# Altium PCB MAX_2870.PcbDoc (part 1 of 2)
Units mil, origin at the board's own origin, x right, y up, seen from the top; angles counter-clockwise.
Board outline 2360 x 1590 mil, 4 copper layers (Component Side, Ground Plane, Power Plane, Solder Side), stack 33.234 mil thick; 80 components, 61 nets, 332 pads, 500 vias.
Unrouted connection lines stored in the file: 26.
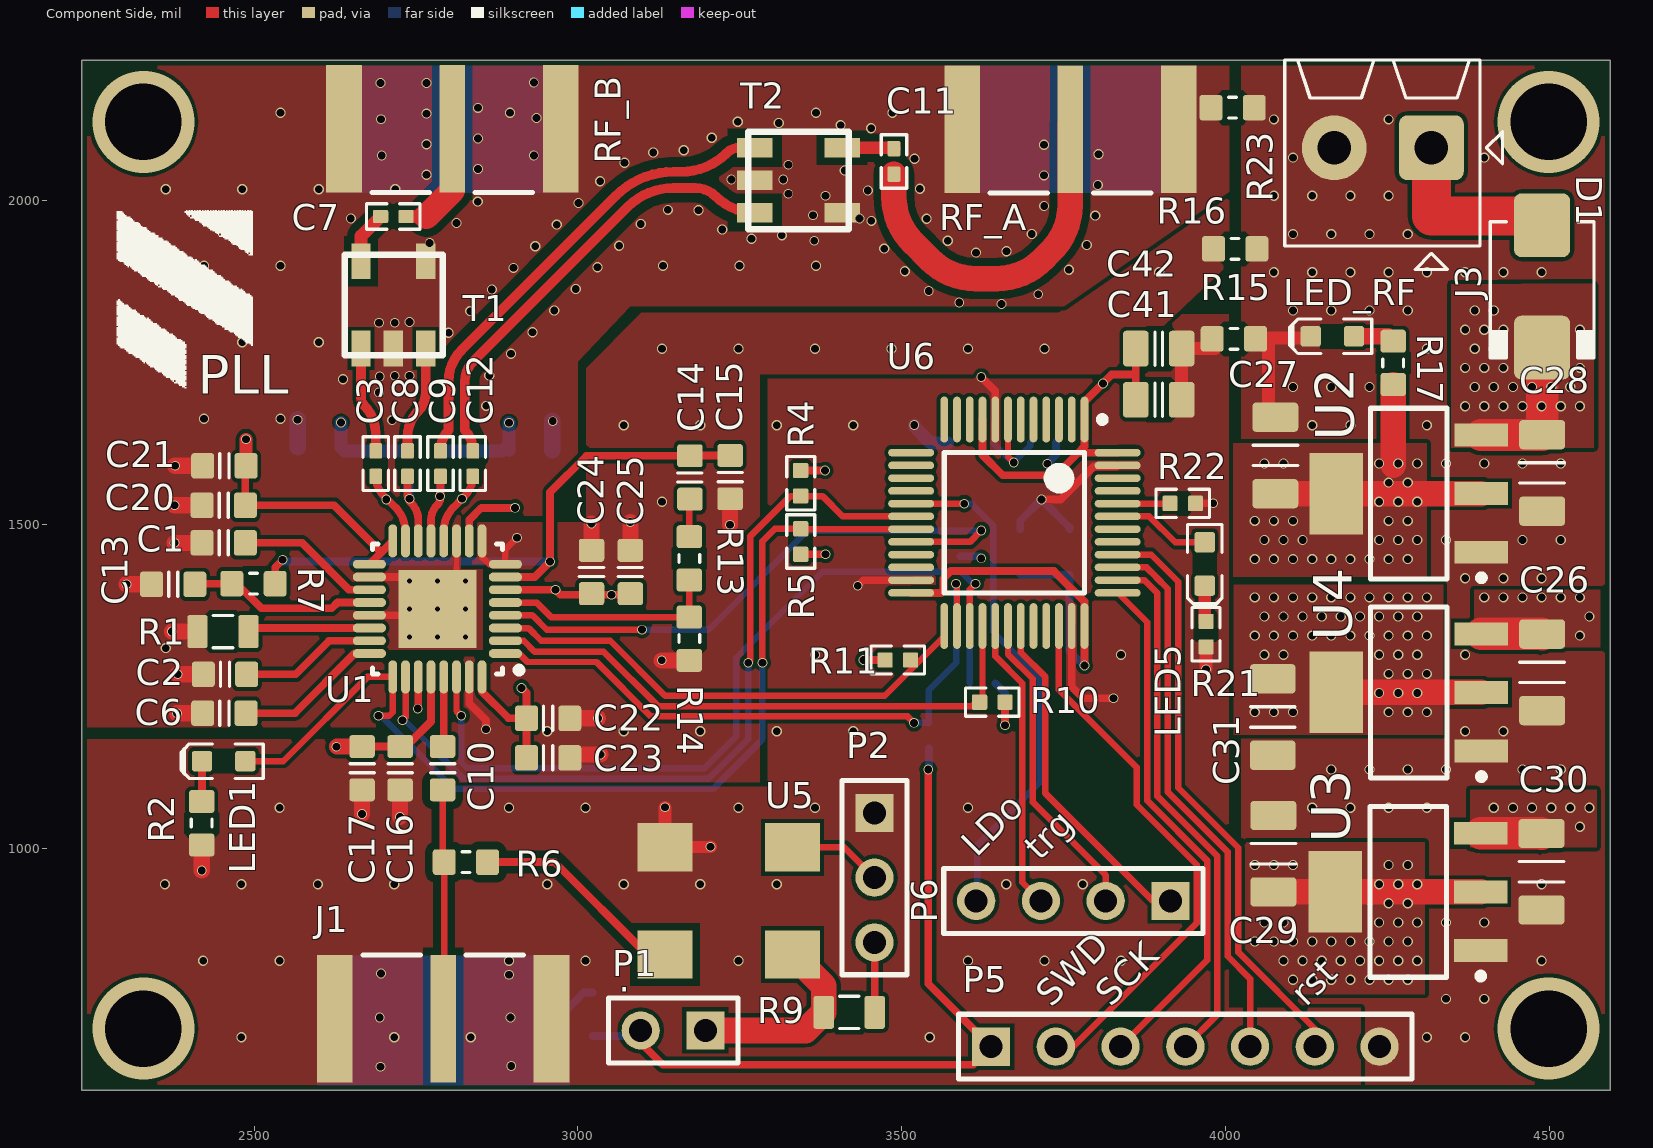
[diagram p0: Component Side view]
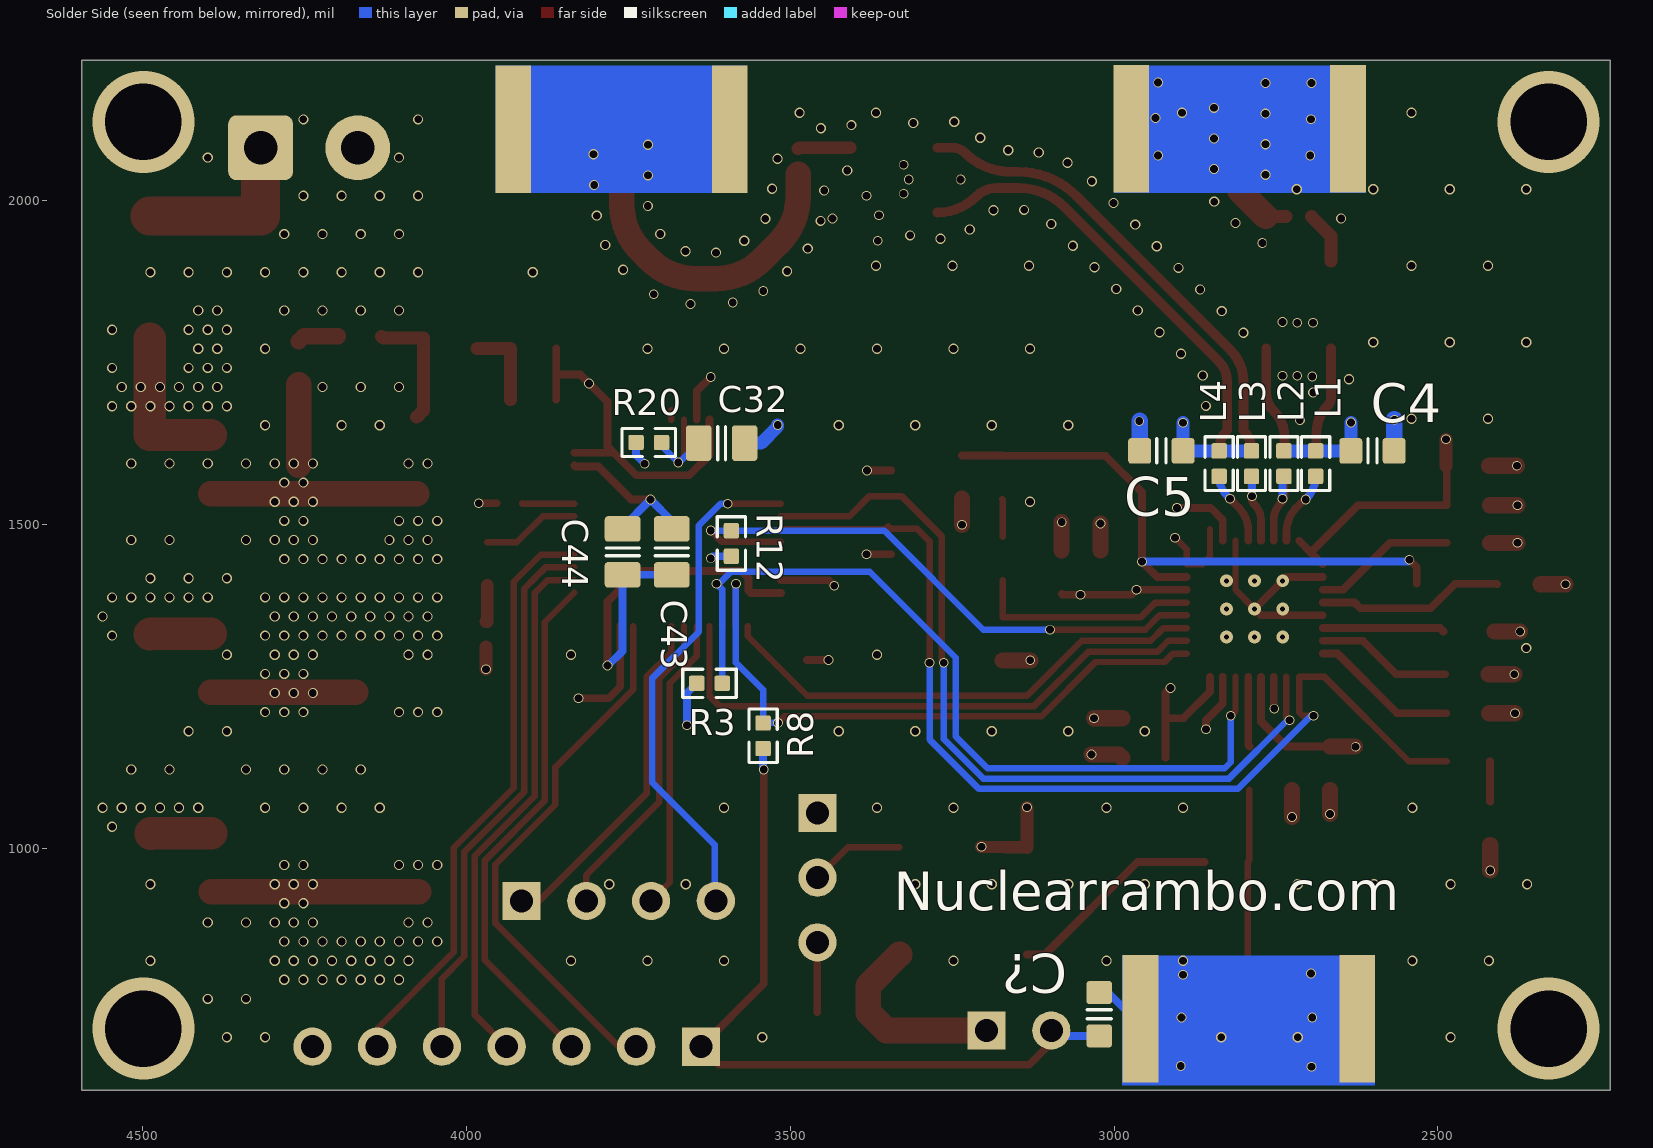
[diagram p1: Solder Side view, seen from below]
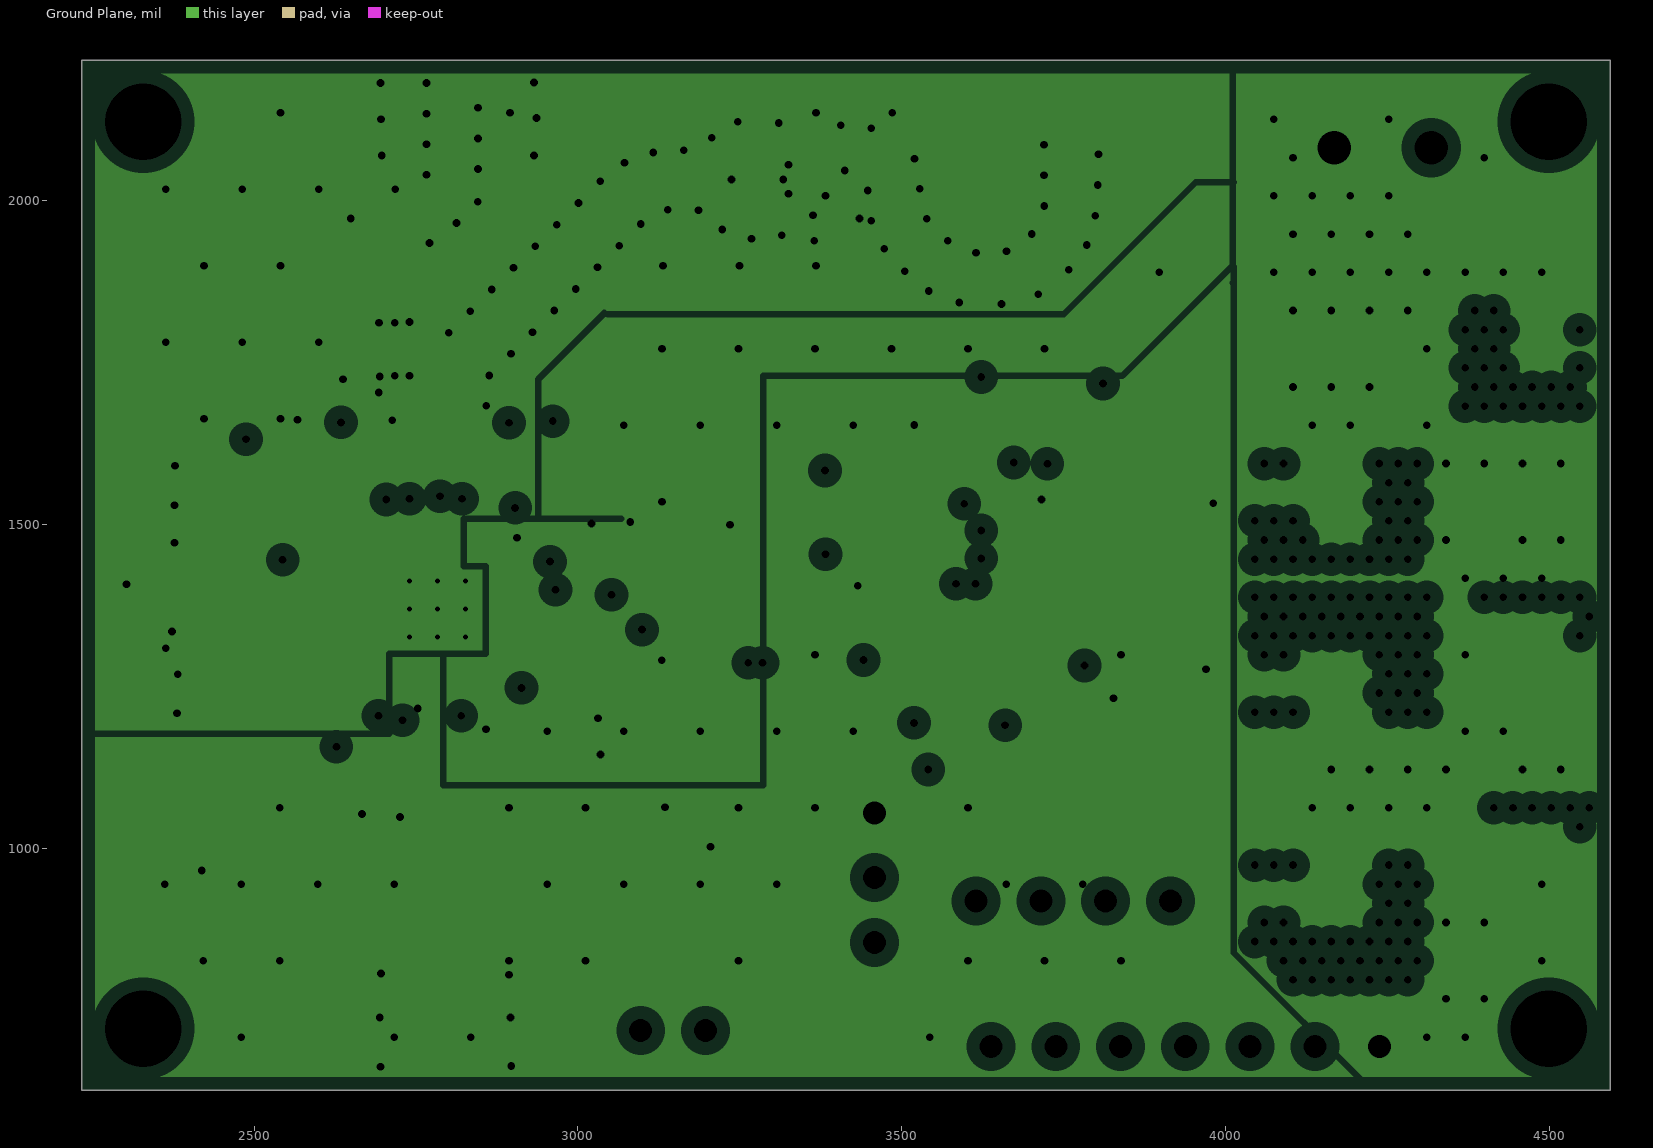
[diagram p2: Ground Plane, clearances drawn from the general rule]
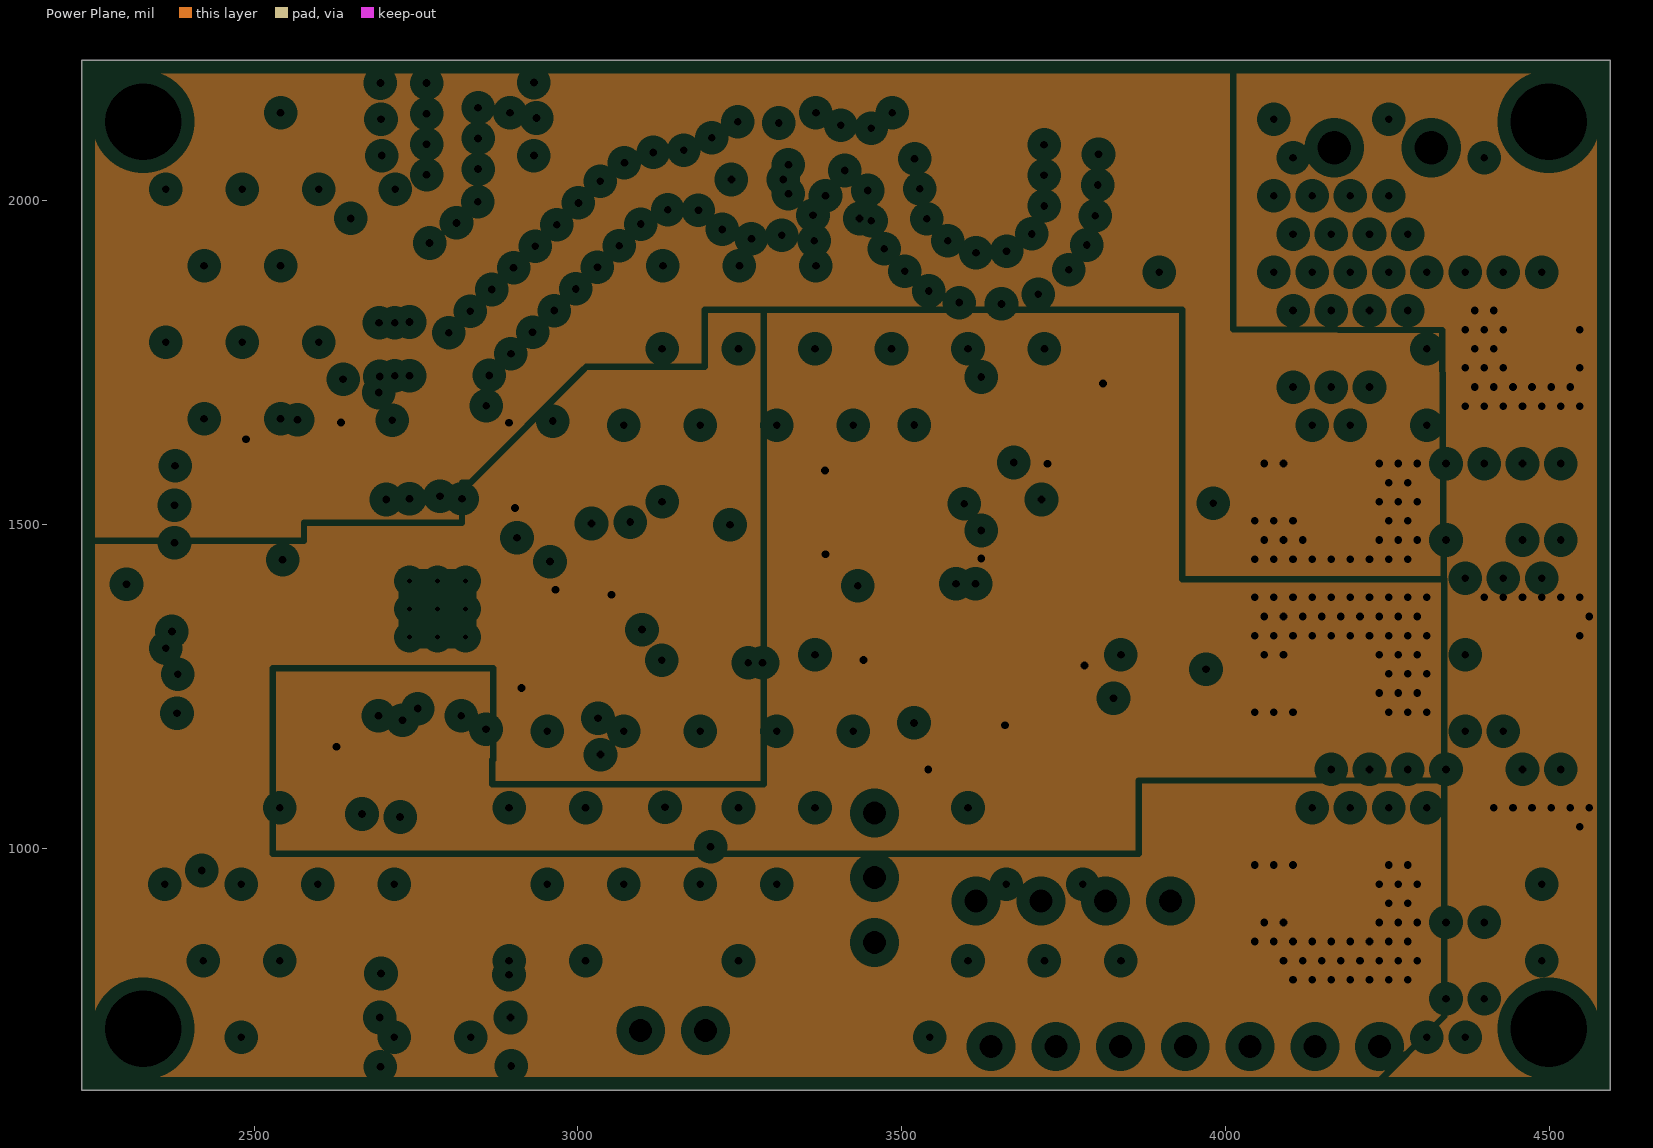
[diagram p3: Power Plane, clearances drawn from the general rule]

## Layer stack, top to bottom
Top Solder: solder mask 0.4, Solder Resist, Dk 3.5
Component Side: signal copper 1.4
Dielectric 1: core 12.6, FR-4, Dk 4.8
Ground Plane: plane copper 1.417, net (Multiple Nets)
Dielectric 3: prepreg 5, Dk 4.2
Power Plane: plane copper 1.417, net (Multiple Nets)
Dielectric 4: core 10, Dk 4.2
Solder Side: signal copper 1.4
Bottom Solder: solder mask 0.4, Solder Resist, Dk 3.5

## Board outline
2234,627 4594,627 4594,2217 2234,2217

## Design rules (kind name [scope] priority, off if disabled: settings)
BoardOutlineClearance [All] p1: gap=7.87 ignorepadtopadclearanceinfootprint=FALSE
Clearance ref [InNet('NetR6_1') or InNet('NetC10_1') vs InNet('GND_DIG')] p1: gap=12 ignorepadtopadclearanceinfootprint=TRUE
Clearance diffpair [InDifferentialPair('LO') vs InNet('GND_RF')] p2: gap=15 ignorepadtopadclearanceinfootprint=TRUE
Clearance rf [InNet('NetC11_2') or InNet('NetC11_1') or InNet('NetC7_1') or InNet('NetC7_2') vs InNet('GND_RF')] p3: gap=12 ignorepadtopadclearanceinfootprint=TRUE
Clearance Clearance_1 [InNet('NetC10_1') vs InNet('GND_RF')] p4: gap=15 ignorepadtopadclearanceinfootprint=TRUE
Clearance [All] p5: gap=6 ignorepadtopadclearanceinfootprint=TRUE
DiffPairsRouting [All] p1: maxlimit=10 minlimit=10 mostfreqgap=10 toplayer_minwidth=15 toplayer_maxwidth=15 toplayer_prefwidth=15 bottomlayer_minwidth=15 bottomlayer_maxwidth=15 bottomlayer_prefwidth=15 maxuncoupledlength=500
HoleToHoleClearance [All] p1: gap=6 allowstackedmicrovias=TRUE
PlaneClearance [All] p1: clearance=20
PlaneConnect [All] p1: planeconnectstyle=Direct reliefexpansion=20 reliefentries=4 reliefconductorwidth=10 reliefairgap=10
PolygonConnect [All] p1: connectstyle=Direct reliefconductorwidth=10 reliefentries=4 polygonreliefangle="90 Angle" airgapwidth=10
RoutingVias [All] p1: holewidth=8 width=12 viastyle="Through Hole" minholewidth=8 minwidth=12 maxholewidth=28 maxwidth=50
SolderMaskExpansion [All] p1: expansion=4
Width [All] p1: maxlimit=60 minlimit=10 preferedwidth=10
26 further rules are at their usual default settings.

## Classes and differential pairs
component class PLL_Controller_STM32: C32 C41 C42 C43 C44 LED5 P5 P6 R20 R21 R22 U6
component class Power_Supply: C26 C27 C28 C29 C30 C31 D1 J3 LED_RF R17 U2 U3 U4
component class MAX_2870: C1 C2 C3 C4 C5 C6 C7 C8 C9 C10 C11 C12 C13 C14 C15 C16 C17 C20 C21 C22 C23 C24 C25 C? J1 L1 L2 L3 L4 LED1 P1 P2 R1 R2 R3 R4 R5 R6 R7 R8 R9 R10 R11 R12 R13 R14 R15 R16 R23 RF_A RF_B T1 T2 U1 U5
differential pair RF: +RF_P -RF_N
differential pair LO: +LO_P -LO_N

## Components (designator, comment, footprint, x,y, rotation, side; value= is the part's Value field where it differs from the comment)
C1 "approved sub OK" CAPC1608X90N 2453,1472 r180 top value=1µ
C2 "approved sub OK" CAPC1608X90N 2455,1269 r0 top value=1µ
C3 "100p" CAPC1005X55N 2687.78,1594.33 r90 top
C4 "approved sub OK" CAPC1608X90N 2601,1614 r180 bottom value=10n
C5 "approved sub OK" CAPC1608X90N 2927,1614 r0 bottom value=10n
C6 "approved sub OK" CAPC1608X90N 2454,1209 r0 top value=1µ
C7 "100p" CAPC1005X55N 2715,1976 r0 top
C8 "100p" CAPC1005X55N 2736.78,1594.33 r90 top
C9 "100p" CAPC1005X55N 2787.78,1594.33 r90 top
C10 "approved sub OK" CAPC1608X90N 2791,1124 r90 top value=10n
C11 "100p" CAPC1005X55N 3488,2061 r270 top
C12 "100p" CAPC1005X55N 2837.78,1594.33 r90 top
C13 "100p" CAPC1608X90N 2375,1408 r180 top
C14 "approved sub OK" CAPC1608X90N 3173,1573 r270 top value=100n
C15 "100p" CAPC1608X90N 3235,1573.54 r90 top
C16 "100p" CAPC1608X90N 2725.41,1124 r270 top
C17 "approved sub OK" CAPC1608X90N 2666.68,1124 r270 top value=10n
C20 "100p" CAPC1608X90N 2453,1530 r180 top
C21 "approved sub OK" CAPC1608X90N 2454,1591 r180 top value=10n
C22 "100p" CAPC1608X90N 2954,1201 r0 top
C23 "approved sub OK" CAPC1608X90N 2954,1140 r0 top value=10n
C24 "100p" CAPC1608X90N 3021,1427 r90 top
C25 "approved sub OK" CAPC1608X90N 3081,1427 r90 top value=10n
C26 "approved sub OK" CAPC3216X180N 4489,1272 r270 top value=10µ
C27 "approved sub OK" CAPC3216X180N 4077,1607 r90 top value=10µ
C28 "approved sub OK" CAPC3216X180N 4489,1580 r270 top value=10µ
C29 "approved sub OK" CAPC3216X180N 4074,992 r90 top value=10µ
C30 "approved sub OK" CAPC3216X180N 4488,964 r270 top value=10µ
C31 "approved sub OK" CAPC3216X180N 4073,1203 r270 top value=10µ
C32 "approved sub OK" CAPC2012X135N 3606,1626 r0 bottom value=10µ
C41 "approved sub OK" CAPC2012X135N 3897,1693 r180 top value=10µ
C42 "approved sub OK" CAPC2012X135N 3897,1772 r180 top value=10µ
C43 "approved sub OK" CAPC2012X135N 3683,1458 r270 bottom value=10µ
C44 "approved sub OK" CAPC2012X135N 3759,1458 r270 bottom value=10µ
C? "approved sub OK" CAPC1608X90N 3023,744 r90 bottom value=10n
D1 "MBRS130L" DO-214AA 4489,1868 r270 top
J1 "32K145-400L5" ROS-32K145-400L5_V 2792,638.57 r180 top
J3 "Stackable ScrewTerm" 2P_PCB_ScrewTerm_90S_3.81MM 4318,2082 r90 top value="2 position"
L1 "Thick Film" RESC1005X40N 2688.78,1594.33 r270 bottom value=33n
L2 "Thick Film" RESC1005X40N 2737.78,1594.33 r270 bottom value=33n
L3 "Thick Film" RESC1005X40N 2787.78,1594.33 r270 bottom value=33n
L4 "Thick Film" RESC1005X40N 2837.78,1594.33 r270 bottom value=33n
LED1 "Green" LED-0603-GREEN 2453,1134.87 r180 top
LED5 "Green" LED-0603-GREEN 3968,1439.46 r270 top
LED_RF "Green" LED-0603-GREEN 4165,1791 r180 top
P1 "Header 2" HDR1X2 3197,719 r180 top
P2 "Header 3" HDR1X3 3458,1055 r270 top
P5 "Header 7" HDR1X7 3638,694 r0 top
P6 "Header 4" HDR1X4 3915,919 r180 top
R1 "Thick Film" RESC2012X70N 2452,1335 r180 top value=51K
R2 "Thick Film" RESC1608X55N 2419,1039 r90 top value=330E
R3 "Thick Film" RESC1005X40N 3624.79,1255 r0 bottom value=4K7
R4 "Thick Film" RESC1005X40N 3344,1564 r90 top value=4K7
R5 "Thick Film" RESC1005X40N 3344,1474 r270 top value=4K7
R6 "Thick Film" RESC1608X55N 2827,979 r180 top value=63K4
R7 "Thick Film" RESC1608X55N 2499,1409 r0 top value=63K4
R8 "Thick Film" RESC1005X40N 3542,1174 r90 bottom value=4K7
R9 "Thick Film" RESC2012X70N 3419,747 r0 top value=4K7
R10 "Thick Film" RESC1005X40N 3640,1226 r180 top value=4K7
R11 "Thick Film" RESC1005X40N 3494,1291 r0 top value=4K7
R12 "Thick Film" RESC1005X40N 3591,1471 r90 bottom value=4K7
R13 "Thick Film" RESC1608X55N 3172,1448 r270 top value=63K4
R14 "Thick Film" RESC1608X55N 3172,1324 r270 top value=63K4
R15 "Thick Film" RESC1608X55N 4013,1787 r0 top value=0E
R16 "Thick Film" RESC1608X55N 4015,1925.97 r0 top value=0E
R17 "Thick Film" RESC1608X55N 4259,1750 r90 top value=1K5
R20 "Thick Film" RESC1005X40N 3718.43,1627 r0 bottom value=1K
R21 "Thick Film" RESC1005X40N 3970,1331 r270 top value=1K
R22 "Thick Film" RESC1005X40N 3934,1533 r180 top value=1K
R23 "Thick Film" RESC1608X55N 4011,2144 r0 top value=0E
RF_A "32K145-400L5" ROS-32K145-400L5_V 3760.62,2209 r0 top
RF_B "32K145-400L5" ROS-32K145-400L5_V 2806,2210 r0 top
T1 "1:1 Balun" ETC-1-1-13R 2710,1837 r270 top
T2 "1:1 Balun" ETC-1-1-13R 3338,2037 r180 top
U1 "MAX2870" TQFN 2783,1370 r180 top
U2 "LM1117IMP-5.0" SOT223_L 4283,1548 r180 top
U3 "LM1117IMP-3.3" SOT223_L 4282,933 r180 top
U4 "LM1117IMP-3.3" SOT223_L 4283,1241 r180 top
U5 "Component_1" "5mm x 7mm TCXO" 3233,919 r0 top
U6 "STM32F101CBT6" LQFP48_N 3674,1503 r270 top

## Footprints (in the part's own frame and the unit in brackets; to place one, negate y for a bottom-side part, rotate by r counter-clockwise, add the part's x,y. Pads: shape width x height; smd on the part's side, far side on the other; paste and mask are expansions set on the pad)
2P_PCB_ScrewTerm_90S_3.81MM [mil] "TERM BLOCK 2POS SIDE ENT STACKABLE 3.81MM"
  rrect25% 100x100 hole 52: 1(0,0)
  round 100 hole 52: 2(0,150)
  silkscreen extent -188,-110 136,226, body extent -152,-75 136,225, height 335
"5mm x 7mm TCXO" [mm] "DFN, 4-Leads, Body 5.05x7.05mm, Pitch 5.00mm, IPC Medium Density"
  rect 2.15x1.9 smd: 1(-2.5,-2.1) 2(2.5,-2.1) 3(2.5,2.1) 4(-2.5,2.1)
  body extent -4,-3 4,3, height 1.3
CAPC1005X55N [mm] "Chip Capacitor, Body 1.0x0.5mm, EIA 0402, IPC Medium Density"
  round 0.2 on Mech15: 0(0,0)
  rrect20% 0.6x0.5 smd: 1(-0.5,0) 2(0.5,0)
  Component Side pour cut-out: -0.325,0.375 -0.2,0.5 0.2,0.5 0.325,0.375 0.325,-0.375 0.2,-0.5 -0.2,-0.5 -0.325,-0.375
  silkscreen extent -1.05,-0.5 1.05,0.5, body extent -0.52,-0.27 0.53,0.28, height 0.55
CAPC1608X90N [mm] "Chip Capacitor, Body 1.6x0.8mm, EIA 0603, IPC Medium Density"
  round 0.254 on Mech15: 0(0,0)
  rrect25% 0.9x1 smd: 1(-0.85,0) 2(0.85,0)
  silkscreen extent -0.18,-0.48 0.18,0.48, body extent -0.85,-0.45 0.85,0.45, height 0.89
CAPC2012X135N [mm] "Chip Capacitor, Body 2.0x1.2mm, EIA 0805, IPC Medium Density"
  round 0.254 on Mech15: 0(0,0)
  rrect25% 1x1.4 smd: 1(-0.9,0) 2(0.9,0)
  Component Side pour cut-out: -0.675,0.7 -0.475,0.9 0.475,0.9 0.675,0.7 0.675,-0.7 0.475,-0.9 -0.475,-0.9 -0.675,-0.7
  silkscreen extent -0.15,-0.65 0.15,0.65, body extent -1.1,-0.72 1.1,0.73, height 1.34
CAPC3216X180N [mm] "Chip Capacitor, Body 3.2x1.6mm, 1.8mm H, EIA 1206, IPC Medium Density"
  round 0.508 on Mech15: 0(0,0)
  rrect25% 1.15x1.8 smd: 1(-1.5,0) 2(1.5,0)
  silkscreen extent -0.4,-0.88 0.4,0.88, body extent -1.7,-0.9 1.7,0.9, height 1.8
DO-214AA [mm] "JEDEC DO214 variation AA. SMB"
  round 0.508 on Mech15: 0(0,0)
  rrect25% 2.5x2.2 smd: A(-2.4,0) K(2.4,0)
  silkscreen extent -2.54,-2.03 2.79,2.03, body extent -2.8,-1.97 2.8,1.98, height 2.62
ETC-1-1-13R [mil] "1:1 balun transformer"
  rect 55.12x29.92 smd: 1(-70,55) 2(-70,-45) 3(65,-45) 4(65,5) 5(65,55)
  silkscreen extent -80,-70 75,81, body extent -85,-75 80,86, height 108
HDR1X2 [mm] "Connector; Header; 2 Position"
  rect 1.5x1.5 hole 0.9: 1(0,0)
  round 1.5 hole 0.9: 2(2.54,0)
  silkscreen extent -1.27,-1.27 3.81,1.27
HDR1X3 [mm] "Connector; Header; 3 Position"
  rect 1.5x1.5 hole 0.9: 1(0,0)
  round 1.5 hole 0.9: 2(2.54,0) 3(5.08,0)
  silkscreen extent -1.27,-1.27 6.35,1.27
HDR1X4 [mm] "Connector; Header; 4 Position"
  rect 1.5x1.5 hole 0.9: 1(0,0)
  round 1.5 hole 0.9: 2(2.54,0) 3(5.08,0) 4(7.62,0)
  silkscreen extent -1.27,-1.27 8.89,1.27
HDR1X7 [mm] "Connector; Header; 7 Position"
  rect 1.5x1.5 hole 0.9: 1(0,0)
  round 1.5 hole 0.9: 2(2.54,0) 3(5.08,0) 4(7.62,0) 5(10.16,0) 6(12.7,0) 7(15.24,0)
  silkscreen extent -1.27,-1.27 16.51,1.27
LED-0603-GREEN [mm]
  round 0.254 on Mech15: 0(0,0)
  rrect25% 0.8x0.8 smd: A(-0.85,0) K(0.85,0)
  Component Side pour cut-out: -0.5,0.5 0.5,0.5 0.5,-0.5 -0.5,-0.5
  silkscreen extent -1.55,-0.67 1.68,0.67, body extent -0.8,-0.4 0.8,0.4, height 0.75
LQFP48_N [mm] "Thin QFP, 48-Leads, Body 7x7mm, Pitch 0.5mm, IPC Medium Density"
  oval 1.8x0.3 smd: 1(-4.05,2.75) 2(-4.05,2.25) 3(-4.05,1.75) 4(-4.05,1.25) 5(-4.05,0.75) 6(-4.05,0.25) 7(-4.05,-0.25) 8(-4.05,-0.75) 9(-4.05,-1.25) 10(-4.05,-1.75) 11(-4.05,-2.25) 12(-4.05,-2.75) 25(4.05,-2.75) 26(4.05,-2.25) 27(4.05,-1.75) 28(4.05,-1.25) 29(4.05,-0.75) 30(4.05,-0.25) 31(4.05,0.25) 32(4.05,0.75) 33(4.05,1.25) 34(4.05,1.75) 35(4.05,2.25) 36(4.05,2.75)
  oval 0.3x1.8 smd: 13(-2.75,-4.05) 14(-2.25,-4.05) 15(-1.75,-4.05) 16(-1.25,-4.05) 17(-0.75,-4.05) 18(-0.25,-4.05) 19(0.25,-4.05) 20(0.75,-4.05) 21(1.25,-4.05) 22(1.75,-4.05) 23(2.25,-4.05) 24(2.75,-4.05) 37(2.75,4.05) 38(2.25,4.05) 39(1.75,4.05) 40(1.25,4.05) 41(0.75,4.05) 42(0.25,4.05) 43(-0.25,4.05) 44(-0.75,4.05) 45(-1.25,4.05) 46(-1.75,4.05) 47(-2.25,4.05) 48(-2.75,4.05)
  silkscreen extent -4.17,-2.75 2.75,3.58, body extent -3.5,-3.5 3.5,3.5, height 1.6
RESC1005X40N [mm] "Chip Resistor, Body 1.0x0.5mm, EIA 0402, IPC Medium Density"
  round 0.2 on Mech15: 0(0,0)
  rrect20% 0.6x0.6 smd: 1(-0.5,0) 2(0.5,0)
  Component Side pour cut-out: -0.325,0.375 -0.2,0.5 0.2,0.5 0.325,0.375 0.325,-0.375 0.2,-0.5 -0.2,-0.5 -0.325,-0.375
  silkscreen extent -1.05,-0.55 1.05,0.55, body extent -0.52,-0.27 0.53,0.28, height 0.4
RESC1608X55N [mm] "Chip Resistor, Body 1.6x0.8mm, EIA 0603, IPC Medium Density"
  round 0.254 on Mech15: 0(0,0)
  rrect25% 0.9x1 smd: 1(-0.85,0) 2(0.85,0)
  Component Side pour cut-out: -0.6,0.5 -0.4,0.7 0.4,0.7 0.6,0.5 0.6,-0.5 0.4,-0.7 -0.4,-0.7 -0.6,-0.5
  silkscreen extent -0.15,-0.41 0.15,0.41, body extent -0.87,-0.47 0.88,0.48, height 0.54
RESC2012X70N [mm] "Chip Resistor, Body 2.0x1.2mm, EIA 0805, IPC Medium Density"
  round 0.254 on Mech15: 0(0,0)
  rrect25% 0.8x1.3 smd: 1(-1,0) 2(1,0)
  Component Side pour cut-out: -0.725,0.65 -0.525,0.85 0.525,0.85 0.725,0.65 0.725,-0.65 0.525,-0.85 -0.525,-0.85 -0.725,-0.65
  silkscreen extent -0.38,-0.64 0.38,0.64, body extent -1.1,-0.67 1.1,0.68, height 0.69
ROS-32K145-400L5_V [mm] "SMA Right Angle Jack, Edge Mount, 14.25x9.5x4.46mm, Rosenberger Recommended"
  rect 1x5 smd: 1(0,-2.5)
  rect 1.4x5 smd: MP(-4.25,-2.5) MP(4.25,-2.5)
  rect 1.4x5 smd far side paste-2: ""(-4.25,-2.5) ""(4.25,-2.5)
  silkscreen extent -3.15,-5 3.15,-5, body extent -4.75,-4.75 4.75,9.5, height 4.46
SOT223_L [mm] "SOT223, 4-Leads, Body 6.5x3.5mm, Pitch 2.3mm, Lead Span 7mm, IPC High Density"
  rect 2.1x0.9 smd: 1(-2.85,2.3) 2(-2.85,0) 3(-2.85,-2.3)
  rect 2.1x3.2 smd: 4(2.85,0)
  silkscreen extent -2.98,-3.35 1.5,3.42, body extent -1.85,-3.35 1.85,3.35, height 1.7
TQFN [mm] "PQFN, 32-Leads, Body 5.05x5.05mm, Pitch 0.50mm, Thermal Pad 3.05x3.05mm, IPC Medium Density"
  oval 1.3x0.35 smd: 1(-2.669,1.75) 2(-2.669,1.25) 3(-2.669,0.75) 4(-2.669,0.25) 5(-2.669,-0.25) 6(-2.669,-0.75) 7(-2.669,-1.25) 8(-2.669,-1.75) 17(2.669,-1.75) 18(2.669,-1.25) 19(2.669,-0.75) 20(2.669,-0.25) 21(2.669,0.25) 22(2.669,0.75) 23(2.669,1.25) 24(2.669,1.75)
  oval 0.35x1.3 smd: 9(-1.75,-2.669) 10(-1.25,-2.669) 11(-0.75,-2.669) 12(-0.25,-2.669) 13(0.25,-2.669) 14(0.75,-2.669) 15(1.25,-2.669) 16(1.75,-2.669) 25(1.75,2.669) 26(1.25,2.669) 27(0.75,2.669) 28(0.25,2.669) 29(-0.25,2.669) 30(-0.75,2.669) 31(-1.25,2.669) 32(-1.75,2.669)
  rect 3.05x3.05 smd: 33(0,0)
  silkscreen extent -3.32,-2.55 2.55,2.55, body extent -2.55,-2.55 2.55,2.55, height 0.75

## Part data
C1 C2 C6: library part CAPC_1u_0603_X7R_16V_10%, "Capacitor SMD Cer 1uF 10% 16V X7R 0603", Manufacturer 1="TDK Corporation", Manufacturer Part Number 1=C1608X7R1C105K, Package / Case="0603 (1608 metric)", Ratings="16V; X7R", Supplier Part Number 1=445-1604-1-ND, Tolerance=±10%, ComponentLink1Description=http://product.tdk.com/capacitor/mlcc/en/documents/mlcc_commercial_general_en.pdf, ComponentLink1URL=http://product.tdk.com/capacitor/mlcc/en/documents/mlcc_commercial_general_en.pdf, Material=ceramic, SCDType=spec, Supplier 1=Digi-Key
C3 C7 C8 C9 C11 C12: library part CAPC_100p_0402_NP0_50V_5%, "Capacitor SMD Cer 100pF 5% 50V NP0 0402", Manufacturer 1=Yageo, Manufacturer 2="Samsung Electro-Mechanics America, Inc", Manufacturer 3="TDK Corporation", Manufacturer 4=Kemet, Manufacturer Part Number 1=CC0402JRNPO9BN101, Manufacturer Part Number 2=CL05C101JB5NNNC, Manufacturer Part Number 3=C1005C0G1H101J050BA, Manufacturer Part Number 4=C0402C101J5GACTU, Operating Temperature="-55°C ~ 125°C", Package / Case="0402 (1005 Metric)", Ratings="50V; NP0", Supplier Part Number 1=311-1024-1-ND, Tolerance=±5%, ComponentLink1Description=http://www.yageo.com/documents/recent/UPY-GP_NP0_16V-to-50V_9.pdf, ComponentLink1URL=http://www.yageo.com/documents/recent/UPY-GP_NP0_16V-to-50V_9.pdf, ComponentLink2Description=http://www.samsungsem.com/servlet/FileDownload?type=spec&file=CL05C101JB5NNNC.pdf, ComponentLink2URL=http://www.samsungsem.com/servlet/FileDownload?type=spec&file=CL05C101JB5NNNC.pdf, ComponentLink3Description=http://product.tdk.com/capacitor/mlcc/en/documents/mlcc_commercial_general_en.pdf, ComponentLink3URL=http://product.tdk.com/capacitor/mlcc/en/documents/mlcc_commercial_general_en.pdf, ComponentLink4Description=http://www.kemet.com/datasheets&C0402C101J5GACTU, ComponentLink4URL=http://www.kemet.com/datasheets&C0402C101J5GACTU, RoHS 1="RoHS Compliant", RoHS 2="RoHS Compliant", RoHS 3="RoHS Compliant", RoHS 4="RoHS Compliant", SCDType=spec, Size / Dimension="0.039\" L x 0.020\" W (1.00mm x 0.50mm)", Supplier 1=Digi-Key, Supplier 2=Digi-Key, Supplier 3=Digi-Key, Supplier 4=Digi-Key, Supplier Part Number 2=1276-1025-1-ND, Supplier Part Number 3=445-1247-1-ND, Supplier Part Number 4=399-3194-1-ND
C4 C5 C10 C17 C21 C23 C25 C?: library part CAPC_10n_0603_X7R_100V_10%, "Capacitor SMD Cer 10nF 10% 100V X7R 0603", Manufacturer="Murata Electronics North America", Manufacturer Part Number=GCM188R72A103KA37D, Package / Case="0603 (1608 metric)", Ratings="100V; X7R", Supplier Part Number 1=490-4781-1-ND, Tolerance=±10%, Material=ceramic, SCDType=undef, Supplier 1=Digi-Key
C13 C15 C16 C20 C22 C24: library part CAPC_100p_0603_NP0_50V_1%, "Capacitor SMD Cer 100pF 1% 50V NP0 0603", Manufacturer 1="AVX Corporation", Manufacturer 2="Samsung Electro-Mechanics America, Inc", Manufacturer 3=Kemet, Manufacturer Part Number 1=06035A101FAT2A, Manufacturer Part Number 2=CL10C101FB8NNNC, Manufacturer Part Number 3=C0603C101F5GACTU, Operating Temperature="-55°C ~ 125°C", Package / Case="0603 (1608 Metric)", Ratings="50V; NP0", Supplier Part Number 1=478-6202-1-ND, Tolerance=±1%, ComponentLink1Description=http://www.avx.com/docs/Catalogs/ccog.pdf, ComponentLink1URL=http://www.avx.com/docs/Catalogs/ccog.pdf, ComponentLink2Description=http://www.samsungsem.com/servlet/FileDownload?type=spec&file=CL10C101FB8NNNC.pdf, ComponentLink2URL=http://www.samsungsem.com/servlet/FileDownload?type=spec&file=CL10C101FB8NNNC.pdf, ComponentLink3Description=http://www.kemet.com/datasheets&C0603C101F5GACTU, ComponentLink3URL=http://www.kemet.com/datasheets&C0603C101F5GACTU, RoHS 1="RoHS Compliant", RoHS 2="RoHS Compliant", RoHS 3="RoHS Compliant", SCDType=source, Size / Dimension="0.063\" L x 0.032\" W (1.60mm x 0.81mm)", Supplier 1=Digi-Key, Supplier 2=Digi-Key, Supplier 3=Digi-Key, Supplier Part Number 2=1276-2159-1-ND, Supplier Part Number 3=399-7819-1-ND, Thickness (Max)="0.035\" (0.90mm)"
C14: library part CAPC_100n_0603_X7R_50V_10%, "Capacitor SMD Cer 100nF 10% 50V X7R 0603", Manufacturer 1="AVX Corporation", Manufacturer 2="TDK Corporation", Manufacturer Part Number 1=06035C104KAT2A, Manufacturer Part Number 2=C1608X7R1H104K, Package / Case="0603 (1608 Metric)", Ratings="50V; X7R", Supplier Part Number 1=478-5052-1-ND, Tolerance=±10%, ComponentLink1Description=http://www.avx.com/docs/Catalogs/cx7r.pdf, ComponentLink1URL=http://www.avx.com/docs/Catalogs/cx7r.pdf, ComponentLink2Description=http://product.tdk.com/capacitor/mlcc/en/documents/mlcc_commercial_general_en.pdf, ComponentLink2URL=http://product.tdk.com/capacitor/mlcc/en/documents/mlcc_commercial_general_en.pdf, Material=ceramic, SCDType=spec, Supplier 1=Digi-Key, Supplier 2=Digi-Key, Supplier Part Number 2=445-1314-1-ND
C26 C27 C28 C29 C30 C31: library part CAPC_10u_1206_16V, "Capacitor SMD Cer 10uF 10% 16V X7R 1206", Manufacturer 1=Kemet, Manufacturer Part Number 1=C1206C106K4RACTU, Package / Case="1206 (3216 metric)", Ratings="16V; X7R", Supplier Part Number 1=399-3525-1-ND, Tolerance=±10%, Material=ceramic, SCDType=spec, Supplier 1=Digi-Key
C32 C41 C42 C43 C44: library part CAPC_10u_0805_10V, "Capacitor SMD Cer 10uF 10% 10V X5R 0805", Manufacturer 1="AVX Corporation", Manufacturer 2=Kemet, Manufacturer Part Number 1=0805ZD106KAT2A, Manufacturer Part Number 2=C0805C106K8PACTU, Package / Case="0805 (2012 metric)", Ratings="10V; X5R", Supplier Part Number 1=478-5167-1-ND, Tolerance=±10%, ComponentLink1Description=http://www.avx.com/docs/Catalogs/cx5r.pdf, ComponentLink1URL=http://www.avx.com/docs/Catalogs/cx5r.pdf, ComponentLink2Description=http://www.kemet.com/datasheets&C0805C106K8PACTU, ComponentLink2URL=http://www.kemet.com/datasheets&C0805C106K8PACTU, Material=ceramic, SCDType=spec, Supplier 1=Digi-Key, Supplier 2=Digi-Key, Supplier Part Number 2=399-4925-1-ND
D1: library part DIODE_SCHOTTKY_MBRS130L, "Diode Schottky SMD 30V 2A DO-214AA", Manufacturer 1="Fairchild Semiconductor", Package / Case="DO-214AA, SMB", Ratings="30Vr; 2A", Supplier Part Number 1=MBRS130LFSCT-ND, Manufacturer Part Number 1=MBRS130L, Material=Si, SCDType=source, Supplier 1=Digi-Key
J1 RF_A RF_B: "SMA Right Angle Jack, Edge Mount, Up to 18 GHz, -55 to 155 degC", ComponentLink1Description="Manufacturer URL", ComponentLink1URL=http://www.rosenberger.de, ComponentLink2Description=Datasheet, ComponentLink2URL=http://rosenberger.de/ok/images/documents/db/32K145-400L5.pdf, ComponentLink3Description="Package Specification", ComponentLink3URL=http://rosenberger.de/ok/images/documents/db/32K145-400L5.pdf, ComponentLink4Description="Series Overview / Design Note", ComponentLink4URL=http://rosenberger.de/ok/images/documents/spez/32.pdf, ComponentLink5Description="Webshop / RFQ", ComponentLink5URL=http://www.rosenberger.com/en/contact/sales/, DatasheetVersion=b00, Desgin Note 2="For more information about DRC setting, please look at following webpage, http://techdocs.altium.com/display/SCRT/Design+Rule+for+Edge-Mount+Connectors", Design Note 1="Footprint in library is a generic example - only application specific footprint delivers High Performance", Mounting Technology="Surface Mount", PackageDescription="SMA Right Angle Jack, Edge Mount, 14.25 x 9.5 x 4.46 mm", PackageReference=32K145-400L5, PackageVersion=b00, PartNumber=32K145-400L5
J3: library part 2P_ScrewTerm_90S_3.81MM, "Terminal Block Screw Type THT 2-Position 3.81mm pitch", Color=Black, Manufacturer 1="Tyco Electronics", Manufacturer Part Number 1=1776113-2, Package / Case="Side Entry; 3.81mm pitch", Supplier Part Number 1=A97976-ND, Category="Connectors Interconnects", Pitch="0.150\" (3.81mm)", Positions Per Level=2, SCDType=undef, Supplier 1=Digi-Key
L1 L2 L3 L4: library part RES_100K_0402_5%, "Resistor SMD chip 100k Ohm 0.063W 5% 0402", Manufacturer 1="Vishay Dale", Manufacturer 2=Yageo, Manufacturer Part Number 1=CRCW0402100KJNED, Manufacturer Part Number 2=RC0402JR-07100KL, Package / Case="0402 (1005 Metric)", Ratings="1/16 W", Supplier Part Number 1=541-100KJCT-ND, Tolerance=±5%, ComponentLink1Description=http://www.vishay.com/doc?20035, ComponentLink1URL=http://www.vishay.com/doc?20035, ComponentLink2Description=http://www.yageo.com/documents/recent/PYu-RC0402_51_RoHS_L_6.pdf, ComponentLink2URL=http://www.yageo.com/documents/recent/PYu-RC0402_51_RoHS_L_6.pdf, SCDType=undef, Supplier 1=Digi-Key, Supplier 2=Digi-Key, Supplier Part Number 2=311-100KJRCT-ND
LED1 LED5 LED_RF: library part LED_SMD_Green_0603_570nm, "LED 0603 SMD Green 570nm 50mcd 20mA", Current - Test=20mA, Manufacturer 1="Kingbright Company LLC", Manufacturer Part Number 1=APT1608CGCK, Package / Case="0603 (1608 metric)", Ratings="20mcd min; 50 mcd typ; 570 nm", Supplier Part Number 1=754-1116-1-ND, Voltage - Forward (Vf) @ 10mA=2.0V, Voltage - Forward (Vf) Typ=2.1V, Color=Green, ComponentLink1Description=http://www.us.kingbright.com/images/catalog/SPEC/APT1608CGCK.pdf, ComponentLink1URL=http://www.us.kingbright.com/images/catalog/SPEC/APT1608CGCK.pdf, Lens Style/Size="Rectangle with Flat Top, 1.1mm x 0.8mm", Lens Type=Clear, Material=AlGaInP, RoHS 1="RoHS Compliant", SCDType=source, Supplier 1=Digi-Key, Viewing Angle=120°, Wavelength - Dominant=570nm, Wavelength - Peak=574nm
P1: "Header, 2-Pin", LatestRevisionDate=17-Jul-2002, LatestRevisionNote="Re-released for DXP Platform.", Publisher="Altium Limited"
P2: "Header, 3-Pin", LatestRevisionDate=17-Jul-2002, LatestRevisionNote="Re-released for DXP Platform.", Publisher="Altium Limited"
P5: "Header, 7-Pin", LatestRevisionDate=17-Jul-2002, LatestRevisionNote="Re-released for DXP Platform.", Publisher="Altium Limited"
P6: "Header, 4-Pin", LatestRevisionDate=17-Jul-2002, LatestRevisionNote="Re-released for DXP Platform.", Publisher="Altium Limited"
R1: library part RES_51K_0805_1%, "Resistor SMD chip 51k Ohm 0.125W 1% 0805", Manufacturer 1=Yageo, Manufacturer Part Number 1=RC0805FR-0751KL, Package / Case="0805 (2012 Metric)", Ratings=1/8W, Supplier Part Number 1=311-51.0KCRCT-ND, Tolerance=±1%, SCDType=spec, Supplier 1=Digi-Key
R2: library part RES_3K3_0603_5%, "Resistor SMD chip 3.3k Ohm 0.1W 5% 0603", Manufacturer 1=Yageo, Manufacturer Part Number 1=RC0603JR-073K3L, Package / Case="0603 (1608 metric)", Ratings="1/10 W", Supplier Part Number 1=311-3.3KGRTR-ND, Tolerance=±5%, Material="thick film", SCDType=undef, Supplier 1=Digi-Key
R3 R4 R5 R8 R10 R11 R12: library part RES_1M_0402_5%, "Resistor SMD chip 1M Ohm 0.063W 5% 0402", Manufacturer 1="Vishay Dale", Manufacturer 2=Yageo, Manufacturer Part Number 1=CRCW04021M00JNED, Manufacturer Part Number 2=RC0402JR-071ML, Package / Case="0402 (1005 Metric)", Power Rating="0.063W, 1/16W", Ratings="1/16 W", Supplier Part Number 1=541-1.0MJCT-ND, Tolerance=±5%, ComponentLink1Description=http://www.vishay.com/doc?20035, ComponentLink1URL=http://www.vishay.com/doc?20035, ComponentLink2Description=http://www.yageo.com/documents/recent/PYu-RC0402_51_RoHS_L_6.pdf, ComponentLink2URL=http://www.yageo.com/documents/recent/PYu-RC0402_51_RoHS_L_6.pdf, Material="Thick Film", SCDType=spec, Supplier 1=Digi-Key, Supplier 2=Digi-Key, Supplier Part Number 2=311-1.0MJRCT-ND
R6 R7 R13 R14: library part RES_63K4_0603_1%, "Resistor SMD chip 63.4K Ohm 0.1W 1% 0603", Manufacturer 1=Yageo, Manufacturer Part Number 1=RC0603FR-0763K4L, Package / Case="0603 (1608 Metric)", Ratings=1/10W, Supplier Part Number 1=311-63.4KHRCT-ND, Tolerance=±1%, ComponentLink1Description=http://www.yageo.com/documents/recent/PYu-RC0603_51_RoHS_L_4.pdf, ComponentLink1URL=http://www.yageo.com/documents/recent/PYu-RC0603_51_RoHS_L_4.pdf, SCDType=spec, Supplier 1=Digi-Key
R9: library part RES_4K7_0805_1%, "Resistor SMD chip 4.7k Ohm 0.125W 1% 0805", Manufacturer 1=Vishay/Dale, Manufacturer Part Number 1=CRCW08054K70FKEA, Package / Case="0805 (2012 metric)", Ratings=1/8W, Supplier Part Number 1=541-4.70KCCT-ND, Tolerance=±1%, SCDType=spec, Supplier 1=Digi-Key
R15 R16 R23: library part RES_1K_0603_1%, "Resistor SMD chip 1k Ohm 0.1W 1% 0603", Manufacturer 1=Yageo, Manufacturer Part Number 1=RC0603FR-071KL, Package / Case="0603 (1608 Metric)", Ratings=1/10W, Supplier Part Number 1=311-1.00KHRCT-ND, SCDType=spec, Supplier 1=Digi-Key
R17: library part RES_1K5_0603_5%, "Resistor SMD chip 1.5k Ohm 0.1W 5% 0603", Manufacturer 1=Yageo, Manufacturer Part Number 1=RC0603JR-071K5L, Package / Case="0603 (1608 metric)", Ratings="1/10 W", Supplier Part Number 1=311-1.5KGRCT-ND, Tolerance=±5%, Material="thick film", SCDType=spec, Supplier 1=Digi-Key
R20 R21 R22: library part RES_1K_0402_5%, "Resistor SMD chip 1k Ohm 0.063W 5% 0402", Manufacturer 1=Yageo, Manufacturer 2="Vishay Dale", Manufacturer 3="Samsung Electro-Mechanics America, Inc", Manufacturer 4="Rohm Semiconductor", Manufacturer 5="Panasonic Electronic Components", Manufacturer Part Number 1=RC0402JR-071KL, Manufacturer Part Number 2=CRCW04021K00JNED, Manufacturer Part Number 3=RC1005J102CS, Manufacturer Part Number 4=MCR01MRTJ102, Manufacturer Part Number 5=ERJ-2GEJ102X, Package / Case="0402 (1005 Metric)", Ratings="1/16 W", Supplier Part Number 1=311-1.0KJRCT-ND, Tolerance=±5%, ComponentLink1Description=http://www.yageo.com/documents/recent/PYu-RC0402_51_RoHS_L_6.pdf, ComponentLink1URL=http://www.yageo.com/documents/recent/PYu-RC0402_51_RoHS_L_6.pdf, ComponentLink2Description=http://www.vishay.com/doc?20035, ComponentLink2URL=http://www.vishay.com/doc?20035, ComponentLink3Description=http://www.samsungsem.com/servlet/FileDownload?filename=productcatalog/pdf/Chip_Resistor.pdf, ComponentLink3URL=http://www.samsungsem.com/servlet/FileDownload?filename=productcatalog/pdf/Chip_Resistor.pdf, ComponentLink4Description=http://rohmfs.rohm.com/en/products/databook/datasheet/passive/resistor/chip_resistor/mcr_g.pdf, ComponentLink4URL=http://rohmfs.rohm.com/en/products/databook/datasheet/passive/resistor/chip_resistor/mcr_g.pdf, ComponentLink5Description=http://industrial.panasonic.com/www-cgi/jvcr13pz.cgi?E+PZ+3+AOA0001+ERJ2GEJ102X+7+WW, ComponentLink5URL=http://industrial.panasonic.com/www-cgi/jvcr13pz.cgi?E+PZ+3+AOA0001+ERJ2GEJ102X+7+WW, RoHS 1="RoHS Compliant", RoHS 2="RoHS Compliant", RoHS 3="RoHS Compliant", RoHS 4="RoHS Compliant", RoHS 5="RoHS Compliant", SCDType=spec, Supplier 1=Digi-Key, Supplier 2=Digi-Key, Supplier 3=Digi-Key, Supplier 4=Digi-Key, Supplier 5=Digi-Key, Supplier Part Number 2=541-1.0KJCT-ND, Supplier Part Number 3=1276-4376-1-ND, Supplier Part Number 4=RHM1.0KCECT-ND, Supplier Part Number 5=P1.0KJCT-ND
T1 T2: library part ETC-1-1-13R, "ETC-1-1-13R 1:1 Balun", ComponentLink1Description=Datasheet, ComponentLink1URL=https://cdn.macom.com/datasheets/ETC1-1-13.pdf
U1: "MAX2870 PLL with VCO"
U2: "800mA Low-Dropout Linear Regulator, 4-pin SOT-223", Manufacturer="National Semiconductor", PackageTopMarking=XYTT*N06B, PowerWise=N, Supplier Part Number 1=7614135, Code_IPC=SOT223-4, Code_JEDEC=TO-261-AA, ComponentLink1Description="LM1117 Datasheet", ComponentLink1URL=http://www.national.com/ds/LM/LM1117.pdf, ComponentLink2Description="LM1117 Web Page", ComponentLink2URL=http://www.national.com/pf/LM/LM1117.html, ComponentLink3Description="MP04A Package Page", ComponentLink3URL=http://www.national.com/packaging/folders/mp04a.html, CompType="LDO IC", DatasheetVersion=Apr-2006, PackageDescription="Molded SOT-223, 6.50 x 3.56 x 1.6mm Body, 4 Lead, 2.3mm Pitch", PackageReference=MP04A, PackageVersion="revB, Apr-2003", PartNumber=LM1117IMP-5.0, PinCount=4, Published=4-Dec-2008, Publisher="Altium Limited", RoHS=N, Supplier 1=Farnell
U3 U4: "800mA Low-Dropout Linear Regulator, 4-pin SOT-223", Manufacturer="National Semiconductor", PackageTopMarking=XYTT*N05B, PowerWise=N, Supplier Part Number 1=7614123, Code_IPC=SOT223-4, Code_JEDEC=TO-261-AA, ComponentLink1Description="LM1117 Datasheet", ComponentLink1URL=http://www.national.com/ds/LM/LM1117.pdf, ComponentLink2Description="LM1117 Web Page", ComponentLink2URL=http://www.national.com/pf/LM/LM1117.html, ComponentLink3Description="MP04A Package Page", ComponentLink3URL=http://www.national.com/packaging/folders/mp04a.html, CompType="LDO IC", DatasheetVersion=Apr-2006, PackageDescription="Molded SOT-223, 6.50 x 3.56 x 1.6mm Body, 4 Lead, 2.3mm Pitch", PackageReference=MP04A, PackageVersion="revB, Apr-2003", PartNumber=LM1117IMP-3.3, PinCount=4, Published=4-Dec-2008, Publisher="Altium Limited", RoHS=N, Supplier 1=Farnell
U6: "STM32 ARM-based 32-bit MCU with 128 Kbytes Flash, 48-pin LQFP, Industrial Temperature", ComponentLink1Description="Manufacturer Link", ComponentLink1URL=www.st.com/stm32, ComponentLink2Description=Datasheet, ComponentLink2URL=http://www.st.com/stonline/products/literature/ds/13586.pdf, DatasheetVersion="rev6, Mar-2008", PackageDescription="48-Pin Low-Profile Quad Flat Pack, 7 x 7 mm Body, 0.5 mm Pitch (LQFP48)", PackageReference=LQFP48, PackageVersion=Mar-2008, Published=30-May-2008, Publisher="Altium Limited"

## Via types
v1: diameter 15.75, hole 11.81, Component Side to Solder Side, 391 vias
v2: diameter 15, hole 12, Component Side to Solder Side, 96 vias
v3: diameter 19.68, hole 7.87, Component Side to Solder Side, 9 vias
v4: diameter 157.48, hole 118.11, Component Side to Solder Side, 4 vias

## Nets (pads, with @x,y where several pads share a name; then routed paths per layer and width w, separated by ;. In a path a pad name is that pad's centre, name@x,y a point inside that pad or via, vN(x,y) a via of type N, cw(c..) or ccw(c..) an arc to the next point about the centre after c; other vN are vias at no path point)
BOOT0: R22.2 U6.44 | length 81.1
  Component Side w10: U6.44@3833.45,1532.53 3913.84,1532.53 R22.2@3914.32,1533
CE: R12.2 U1.4 U6.20 | length 923.2
  Component Side w10: U1.4@2888.08,1360.16 2929.84,1360.16 2952,1338 v2(3099,1338) ; U6.20@3514.55,1473.47 3605.47,1473.47 v2(3623,1491)
  Solder Side w10: v2(3099,1338) 3202,1338 3354.68,1490.68 R12.2@3591,1490.68 3622.68,1490.68 v2(3623,1491)
CP_OUT: C14.1 C15.2 R7.2 U1.7 | length 943.4
  Component Side w12: R7.2@2532.46,1409 2532.46,1434.46 v2(2544,1446) ; U1.7@2888.08,1419.21 2933.21,1419.21 v2(2957,1443) 2957,1550 3013.46,1606.46 C14.1@3173,1606.46 3173.54,1607 C15.2@3235,1607
  Solder Side w12: v2(2544,1446) 2547,1443 v2(2957,1443)
GND: C26.2 C27.2 C28.2 C29.2 C30.2 C31.2 J3.2 LED_RF.K P5.7 R15.2 R16.2 R23.2 U2.1 U3.1 U4.1 | length 192.6
  Component Side w20: C27.2@4077,1666.06 4066.46,1676.59 4066.46,1788 4128.54,1788 LED_RF.K@4131.54,1791
  other v1: 4311.02,708.66 4370.08,708.66 4340.55,767.72 4399.6,767.72 4488.19,826.77 4340.55,885.83 4399.6,885.83 4488.19,944.88 4133.86,1062.99 4192.91,1062.99 4251.97,1062.99 4311.02,1062.99 4163.38,1122.05 4222.44,1122.05 4281.49,1122.05 4340.55,1122.05 4458.66,1122.05 4517.72,1122.05 4370.08,1181.1 4429.13,1181.1 4370.08,1299.21 4370.08,1417.32 4429.13,1417.32 4488.19,1417.32 4340.55,1476.38 4458.66,1476.38 4517.72,1476.38 4340.55,1594.49 4399.6,1594.49 4458.66,1594.49 4517.72,1594.49 4133.86,1653.54 4192.91,1653.54 4311.02,1653.54 4104.33,1712.6 4163.38,1712.6 4222.44,1712.6 4311.02,1771.65 4104.33,1830.71 4163.38,1830.71 4222.44,1830.71 4281.49,1830.71 4074.8,1889.76 4133.86,1889.76 4192.91,1889.76 4251.97,1889.76 4311.02,1889.76 4370.08,1889.76 4429.13,1889.76 4488.19,1889.76 4104.33,1948.82 4163.38,1948.82 4222.44,1948.82 4281.49,1948.82 4074.8,2007.87 4133.86,2007.87 4192.91,2007.87 4251.97,2007.87 4104.33,2066.93 4399.6,2066.93 4074.8,2125.98 4251.97,2125.98
GND_DIG: C16.2 C17.2 C32.1 C41.1 C42.1 C43.1 C44.1 C?.2 J1. J1.MP P2.1 R2.1 R15.1 R21.2 R22.1 U1.27 U5.4 U6.8 U6.23 U6.35 U6.47 | length 1227.2
  Component Side w12: v2@2753.47,1217 U1.27@2753.47,1264.92 ; v2(3432,1405.76) 3440.65,1414.42 U6.23@3514.55,1414.42 ; v2(3623,1728) 3644.47,1706.53 U6.8@3644.47,1662.45 ; v2(3716,1539) 3745.7,1539 3796.5,1589.8 3831.67,1589.8 U6.47@3833.45,1591.58 ; U6.35@3762.58,1343.55 3762.58,1249.64 3780.22,1232 v2(3827,1232) ; R22.1@3953.68,1533 v2(3981,1533)
  Component Side w20: v2(3134.57,1063.57) U5.4@3134.57,1001.68 v2(3204.9,1002.68) ; C41.1@3932.43,1693 C42.1@3932.43,1772 R15.1@3983.54,1772 ; v2(3970,1276.78) R21.2@3970,1311.32
  Component Side w25: v2(2419,966) R2.1@2419,1005.54 ; v2(2666.68,1053.32) C17.2@2666.68,1090.54 ; v2(2725.41,1048.59) C16.2@2725.41,1090.54
  Solder Side w12: J1.@2959.32,728 3008.79,777.46 C?.2@3023,777.46 ; C43.1@3683,1493.43 3683,1506 v2(3716,1539) 3759,1496 C44.1@3759,1493.43
  Solder Side w20: v2(3519.47,1654) 3519.47,1651.53 3545,1626 C32.1@3570.57,1626
  other v1: 2480.31,708.66 2716.53,708.66 2834.64,708.66 3543.31,708.66 2421.26,826.77 2539.37,826.77 2893.7,826.77 3011.81,826.77 3248.03,826.77 3602.36,826.77 3720.47,826.77 3838.58,826.77 2362.2,944.88 2480.31,944.88 2598.42,944.88 2716.53,944.88 2952.76,944.88 3070.87,944.88 3188.98,944.88 3307.09,944.88 3661.42,944.88 3779.53,944.88 2539.37,1062.99 2893.7,1062.99 3011.81,1062.99 3248.03,1062.99 3366.14,1062.99 3602.36,1062.99 3307.09,1181.1 3425.2,1181.1 3366.14,1299.21 3838.58,1299.21 3307.09,1653.54 3425.2,1653.54
  other v2: 2695,663 2897,664 2694,739 2896,739 2893.54,805 2695.84,807 2752.54,1216
GND_PLL: C15.1 C22.2 C23.2 C24.2 C25.2 R14.2 R16.1 U1.8 U1.9 U1.31 | length 484.6
  Component Side w10: U1.9@2851.9,1492.9 U1.9@2851.9,1475.08 2851.9,1450.1 2863.1,1438.9 U1.8@2888.08,1438.9 2888.08,1462.08 v2(2906,1480)
  Component Side w12: U1.31@2832.21,1264.92 2832.21,1223.94 2858,1198.16 v2(2858,1184)
  Component Side w25: C23.2@2987.46,1140 2992.46,1145 v2(3035,1145) ; C22.2@2987.46,1201 v2(3031,1201) ; C24.2@3021,1460.46 v2(3021,1502) ; C25.2@3081,1460.46 v2(3081,1504) ; v2(3129.46,1290.54) R14.2@3172,1290.54 ; v2(3235,1500) C15.1@3235,1540.07
  other v1: 2952.76,1181.1 2952.76,1181.1 3070.87,1181.1 3070.87,1181.1 3188.98,1181.1 3188.98,1181.1 3129.92,1535.43 3129.92,1535.43 3070.87,1653.54 3070.87,1653.54 3188.98,1653.54 3188.98,1653.54 3129.92,1771.65 3248.03,1771.65 3366.14,1771.65 3484.25,1771.65 3602.36,1771.65 3720.47,1771.65 3897.64,1889.76